# EAGLE board transistor board (EAGLE 6.4)
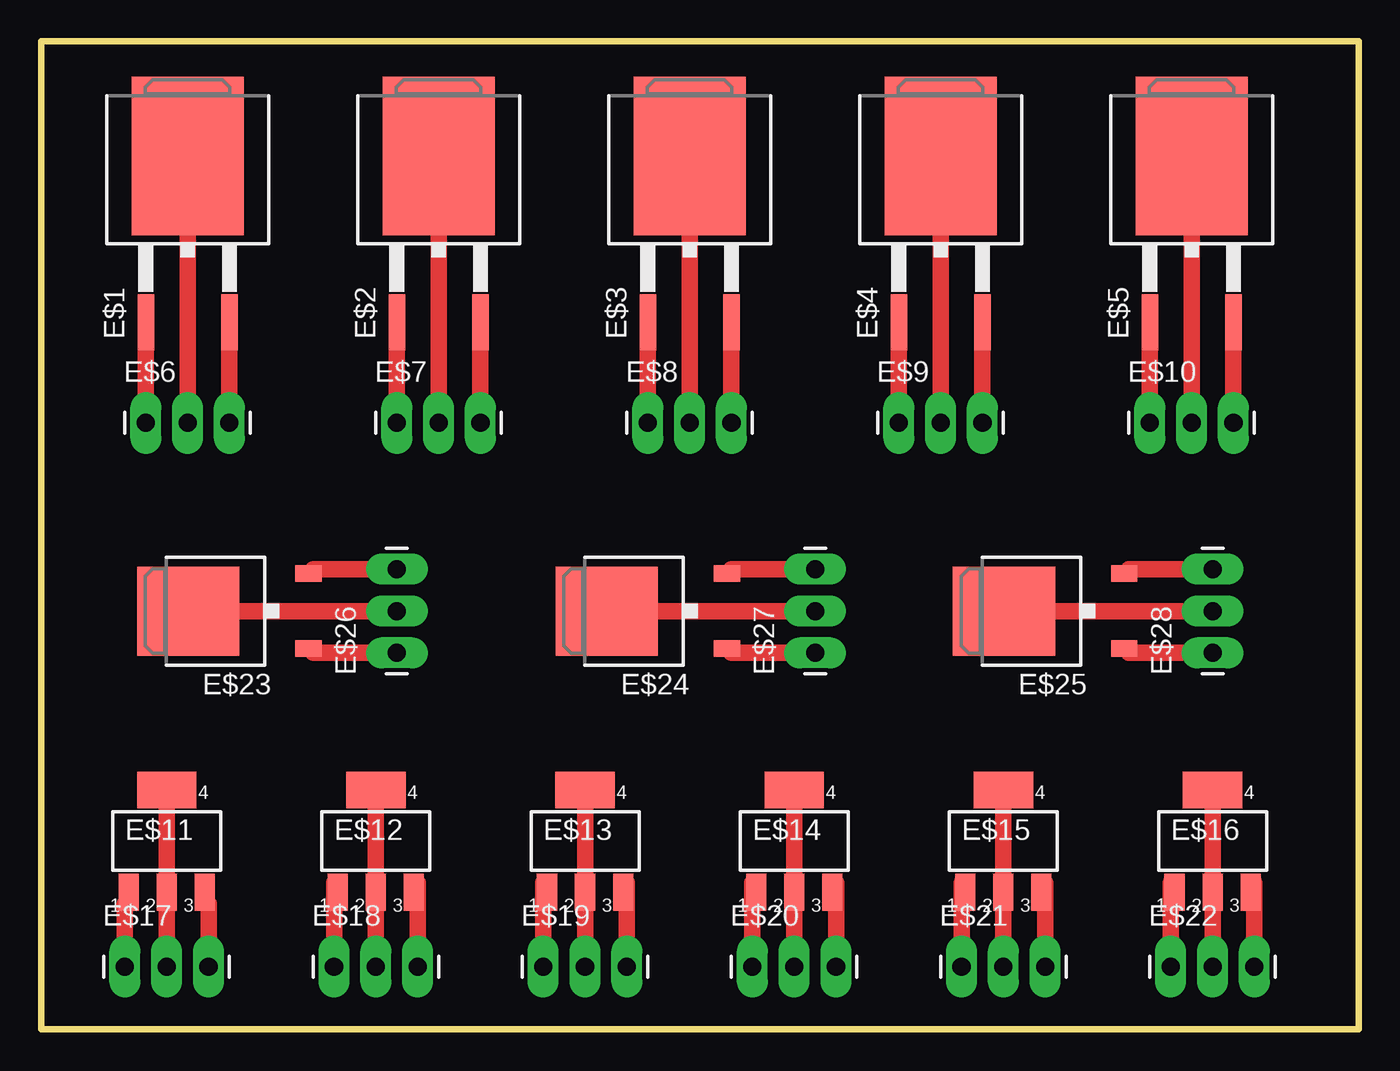
[diagram p0: board, top side]

Size 80 x 60 mm. Coordinates in mm from the lower left corner, seen from the top.
Outline: 0,0 80,0 80,60 0,60 0,0
Copper layers (1*16): Top 0.035mm / dielectric 1.5mm / Bottom 0.035mm
Design rules "default": minimum track width 10mil, minimum drill 0.6mm, track to track 8mil, track to pad 8mil, pad to pad 8mil, via to via 8mil, smd to smd 8mil, copper to edge 40mil, drill to drill 8mil, minimum pad ring 10mil, minimum via ring 8mil, stop-mask expansion 4mil, vias tented up to drill 0mil, thermal gap 10mil

## Footprints (pad centres in the part's own frame; a part is rotated, then mirrored left to right if it is on the bottom)
TO263 = smd 1 x 3.4: 1 -2.54,-6.6; 2 2.54,-6.6 | smd 6.8 x 9.6: 3 0,3.5
1X03_LONGPADS = drill 1.1 pad 1.88 long: 1 0,0; 2 2.54,0; 3 5.08,0
SOT-223 = smd 1.219 x 2.235: 1 -2.311,-3.099; 2 0,-3.099; 3 2.311,-3.099 | smd 3.6 x 2.2: 4 0,3.099
TO252 = smd 1 x 1.6: 1 -2.28,-4.8; 2 2.28,-4.8 | smd 5.4 x 6.2: 3 0,2.5

## Placement (x,y rotation side)
E$1  [TO263]  8.89,49.53 0 top
E$2  [TO263]  24.13,49.53 0 top
E$3  [TO263]  39.37,49.53 0 top
E$4  [TO263]  54.61,49.53 0 top
E$5  [TO263]  69.85,49.53 0 top
E$6  [1X03_LONGPADS]  6.35,36.83 0 top
E$7  [1X03_LONGPADS]  21.59,36.83 0 top
E$8  [1X03_LONGPADS]  36.83,36.83 0 top
E$9  [1X03_LONGPADS]  52.07,36.83 0 top
E$10  [1X03_LONGPADS]  67.31,36.83 0 top
E$11  [SOT-223]  7.62,11.43 0 top
E$12  [SOT-223]  20.32,11.43 0 top
E$13  [SOT-223]  33.02,11.43 0 top
E$14  [SOT-223]  45.72,11.43 0 top
E$15  [SOT-223]  58.42,11.43 0 top
E$16  [SOT-223]  71.12,11.43 0 top
E$17  [1X03_LONGPADS]  5.08,3.81 0 top
E$18  [1X03_LONGPADS]  17.78,3.81 0 top
E$19  [1X03_LONGPADS]  30.48,3.81 0 top
E$20  [1X03_LONGPADS]  43.18,3.81 0 top
E$21  [1X03_LONGPADS]  55.88,3.81 0 top
E$22  [1X03_LONGPADS]  68.58,3.81 0 top
E$23  [TO252]  11.43,25.4 90 top
E$24  [TO252]  36.83,25.4 90 top
E$25  [TO252]  60.96,25.4 90 top
E$26  [1X03_LONGPADS]  21.59,22.86 90 top
E$27  [1X03_LONGPADS]  46.99,22.86 90 top
E$28  [1X03_LONGPADS]  71.12,22.86 90 top

## Library data of the parts
E$1-E$5 E$11-E$16 E$23-E$25 = iStivi - Transistor-FET-reg
E$6-E$10 E$17-E$22 E$26-E$28 = iStivi - Header-Connector

## Nets
S$1: E$6.1
S$2: E$6.2
S$3: E$6.3
S$4: E$7.1
S$5: E$7.2
S$6: E$7.3
S$7: E$8.1
S$8: E$8.2
S$9: E$8.3
S$10: E$9.1
S$11: E$9.3
S$12: E$9.2
S$13: E$10.1
S$14: E$10.2
S$15: E$10.3
S$16: E$17.1
S$17: E$17.2
S$18: E$17.3
S$19: E$18.1
S$20: E$18.2
S$21: E$18.3
S$22: E$19.1
S$23: E$19.2
S$24: E$19.3
S$25: E$20.1
S$26: E$20.2
S$27: E$20.3
S$28: E$21.1
S$29: E$21.2
S$30: E$21.3
S$31: E$22.1
S$32: E$22.2
S$33: E$22.3
S$34: E$26.1
S$35: E$26.2
S$36: E$26.3
S$37: E$27.2
S$38: E$27.3
S$39: E$27.1
S$40: E$28.1
S$41: E$28.2
S$42: E$28.3

## Tracks (layer width: path | path; a pad name or v marks a point on that pad's centre or on a via)
S$1
  Top 1.016: E$6.1 6.35,41.91
S$2
  Top 1.016: E$6.2 8.89,49.53
S$3
  Top 1.016: E$6.3 11.43,43.18
S$4
  Top 1.016: E$7.1 21.59,43.18
S$5
  Top 1.016: E$7.2 24.13,49.53
S$6
  Top 1.016: E$7.3 26.67,41.91
S$7
  Top 1.016: E$8.1 36.83,41.91
S$8
  Top 1.016: E$8.2 39.37,49.53
S$9
  Top 1.016: E$8.3 41.91,43.18
S$10
  Top 1.016: E$9.1 52.07,43.18
S$11
  Top 1.016: E$9.3 57.15,43.18
S$12
  Top 1.016: E$9.2 54.61,49.53
S$13
  Top 1.016: E$10.1 67.31,43.18
S$14
  Top 1.016: E$10.2 69.85,49.53
S$15
  Top 1.016: E$10.3 72.39,41.91
S$16
  Top 1.016: E$17.1 5.08,7.62
S$17
  Top 1.016: E$17.2 7.62,13.97
S$18
  Top 1.016: E$17.3 10.16,7.62
S$19
  Top 1.016: E$18.1 17.78,8.89
S$20
  Top 1.016: E$18.2 20.32,13.97
S$21
  Top 1.016: E$18.3 22.86,8.89
S$22
  Top 1.016: E$19.1 30.48,8.89
S$23
  Top 1.016: E$19.2 33.02,13.97
S$24
  Top 1.016: E$19.3 35.56,8.89
S$25
  Top 1.016: E$20.1 43.18,8.89
S$26
  Top 1.016: E$20.2 45.72,13.97
S$27
  Top 1.016: E$20.3 48.26,8.89
S$28
  Top 1.016: E$21.1 55.88,8.89
S$29
  Top 1.016: E$21.2 58.42,13.97
S$30
  Top 1.016: E$21.3 60.96,8.89
S$31
  Top 1.016: E$22.1 68.58,8.89
S$32
  Top 1.016: E$22.2 71.12,13.97
S$33
  Top 1.016: E$22.3 73.66,8.89
S$34
  Top 1.016: E$26.1 16.51,22.86
S$35
  Top 1.016: E$26.2 11.43,25.4
S$36
  Top 1.016: E$26.3 16.51,27.94
S$37
  Top 1.016: E$27.2 36.83,25.4
S$38
  Top 1.016: E$27.3 41.91,27.94
S$39
  Top 1.016: E$27.1 41.91,22.86
S$40
  Top 1.016: E$28.1 66.04,22.86
S$41
  Top 1.016: E$28.2 60.96,25.4
S$42
  Top 1.016: E$28.3 66.04,27.94